# Altium PCB module.PcbDoc
Units mm, origin at the board's own origin, x right, y up, seen from the top; angles counter-clockwise.
Board outline 71 x 30.5 mm, 2 copper layers (Top Layer, Bottom Layer); 46 components, 44 nets, 183 pads, 36 vias.
Unrouted connection lines stored in the file: 2.
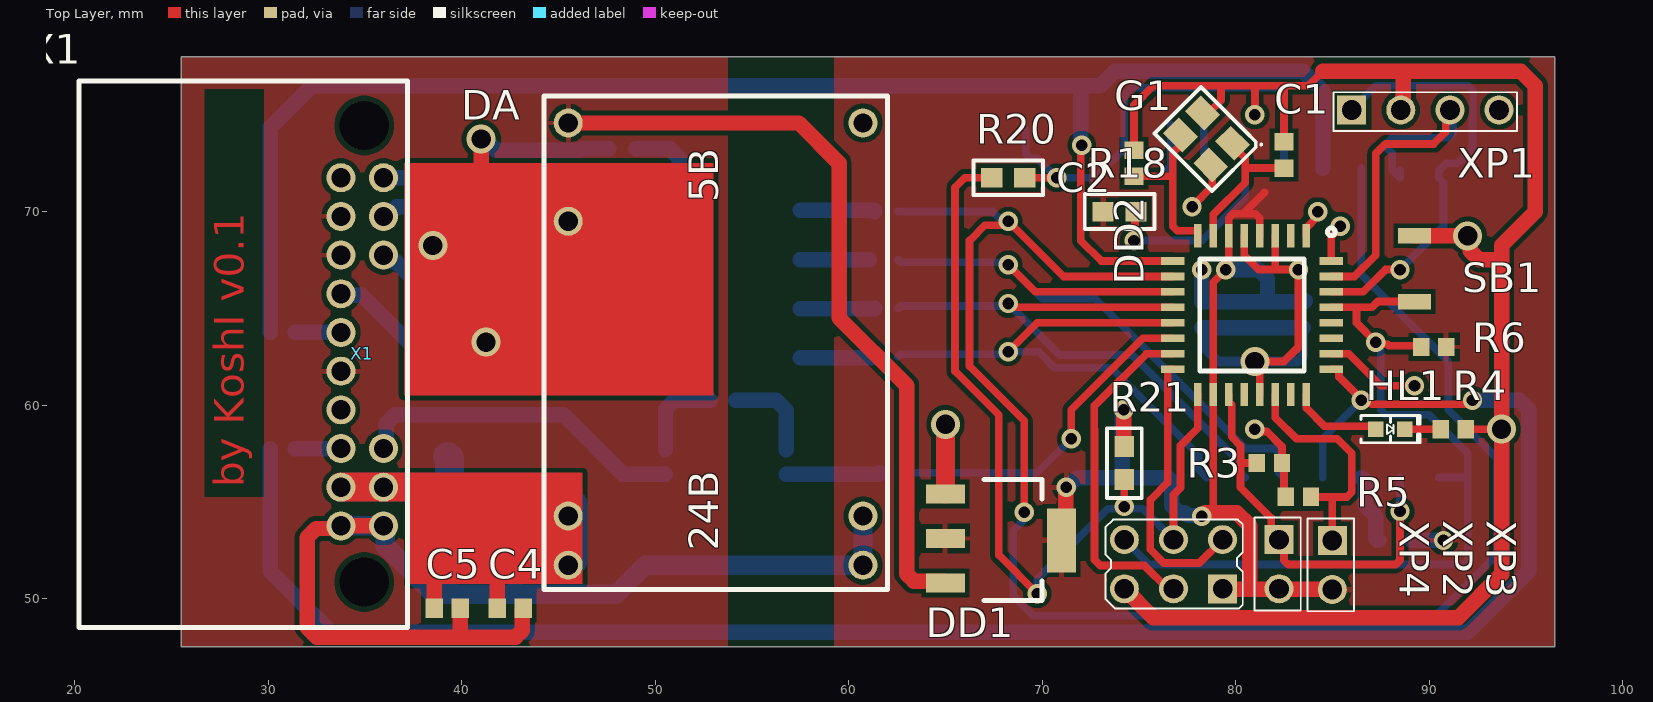
[diagram p0: Top Layer view]
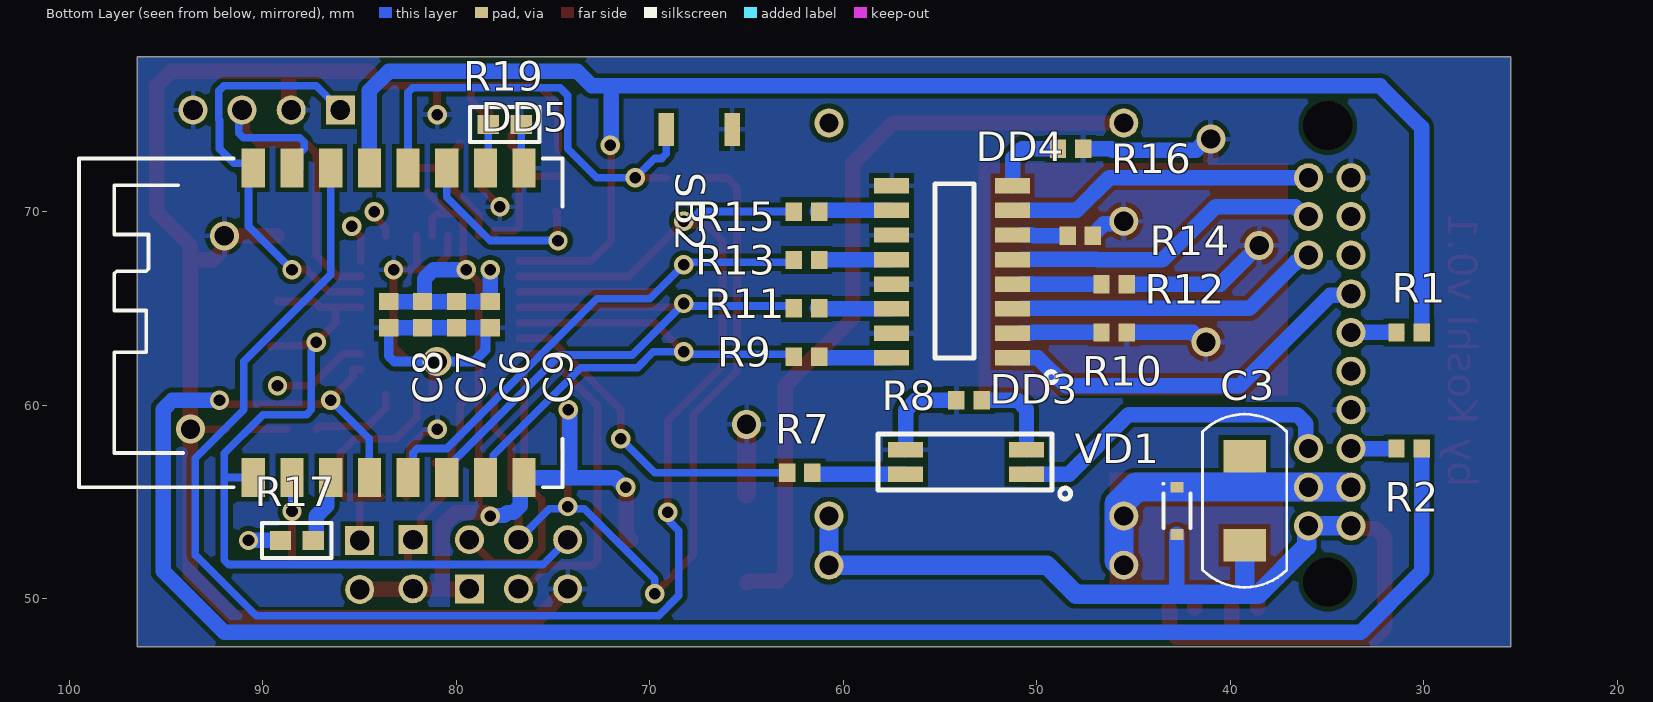
[diagram p1: Bottom Layer view, seen from below]
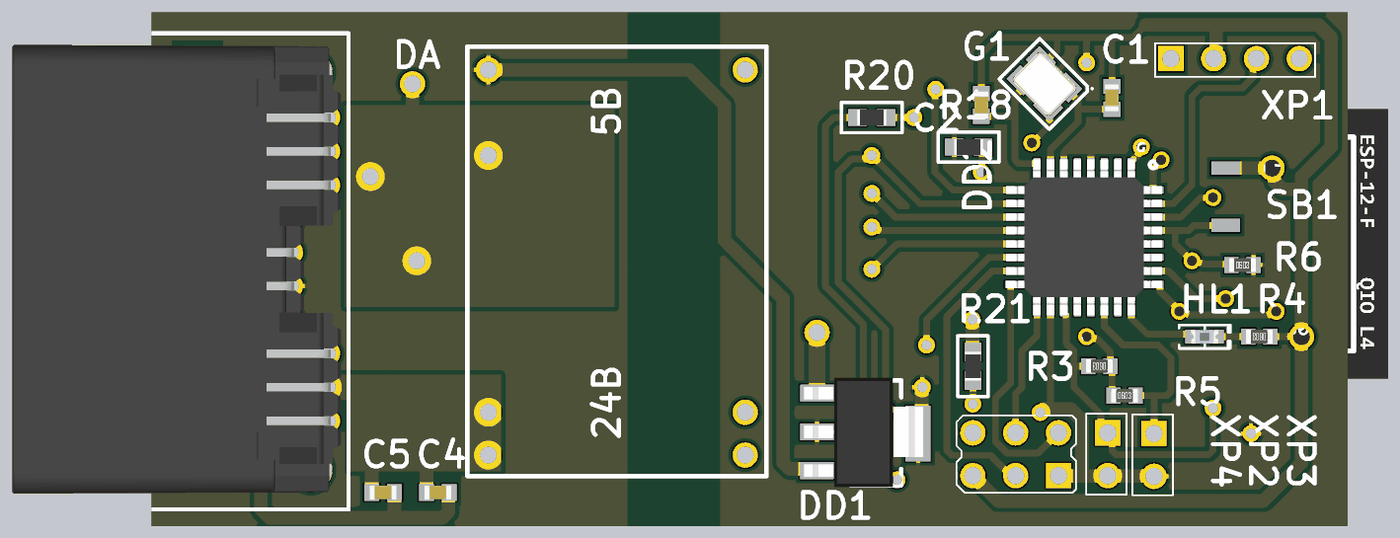
[diagram p2: 3D render of the assembled board from above, using the file's embedded part models]
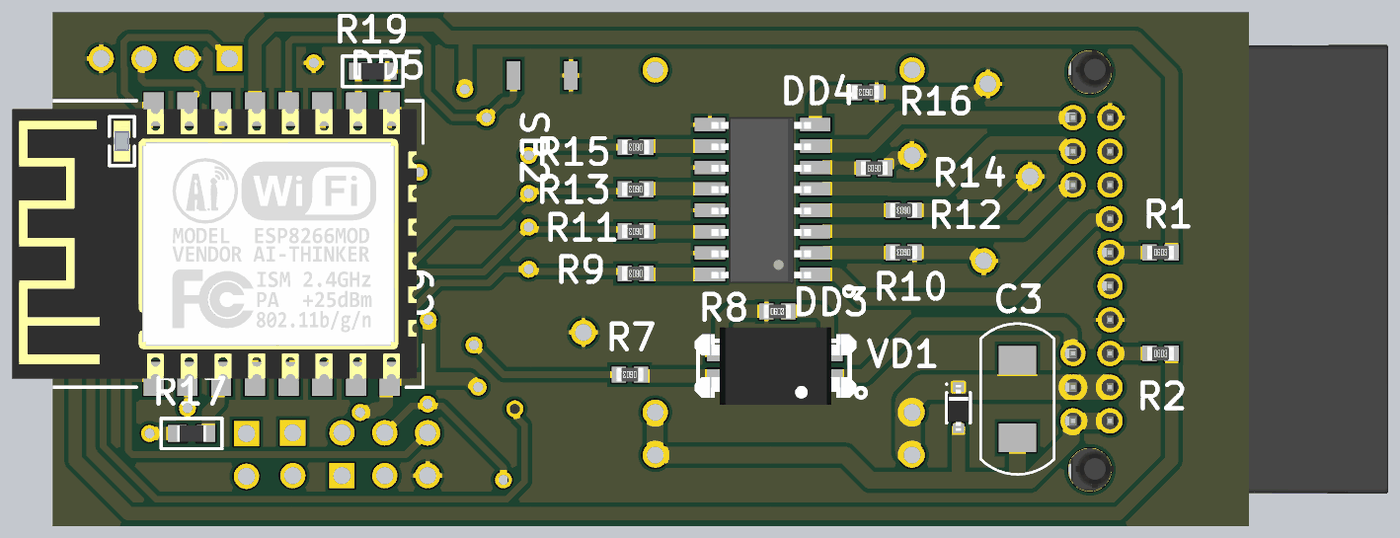
[diagram p3: 3D render of the assembled board from below, using the file's embedded part models]

## Layer stack, top to bottom
Top Solder: solder mask 0.0102, Solder Resist, Dk 3.5
Top Layer: signal copper 0.0356
Dielectric 1: dielectric 0.32, FR-4, Dk 4.8
Bottom Layer: signal copper 0.0356
Bottom Solder: solder mask 0.0102, Solder Resist, Dk 3.5

## Board outline
25.5,47.5 25.5,78 96.5,78 96.5,47.5

## Design rules (kind name [scope] priority, off if disabled: settings)
Clearance [All] p1: gap=0.254 ignorepadtopadclearanceinfootprint=FALSE
ComponentClearance ESP [InComponent('DD5')] p1: gap=0 collisioncheckmode=3 verticalgap=2540 showdistances=FALSE
ComponentClearance [All] p2: gap=0.01 collisioncheckmode=3 verticalgap=0.01 showdistances=FALSE
MinimumSolderMaskSliver [All] p1: minsoldermaskwidth=0.01
PolygonConnect [All] p1: connectstyle=Relief reliefconductorwidth=0.254 reliefentries=4 polygonreliefangle="90 Angle" airgapwidth=0.254
RoutingVias [All] p1: holewidth=0.6 width=1 viastyle="Through Hole" minholewidth=0.4 minwidth=0.5 maxholewidth=8 maxwidth=10
SolderMaskExpansion [All] p1: expansion=0.102 istentingtop=FALSE
Width [All] p1: maxlimit=10 minlimit=0.2 preferedwidth=0.254
28 further rules are at their usual default settings.

## Classes and differential pairs
component class "Лист 3. ESP8266": DD5 R17 R18 R19 R20 R21 SB2
net class UART: RX TX
net class SPI: MISO MOSI SCK/DTR
component class "Лист 1. Основной модуль. SchDoc": * C1 C2 C3 C4 C5 C6 C7 C8 C9 DA DD1 DD2 DD3 DD4 G1 HL1 R1 R2 R3 R4 R5 R6 R7 R8 R9 R10 R11 R12 R13 R14 R15 R16 SB1 VD1 X1 XP1 XP2 XP3 XP4

## Components (designator, comment, footprint, x,y, rotation, side; value= is the part's Value field where it differs from the comment)
C1 "CC0603KRX7R8BB104 (0603 X7R 0,1uF 50V 10%)_1" CAPC1608M 82.5,72.925 r270 top value=27
C2 "CC0603KRX7R8BB104 (0603 X7R 0,1uF 50V 10%)_1" CAPC1608M 74.75,72.5 r270 top value=27
C3 "CAP_SMD_POLAR" CC_T491C476K016AT 39.25,55.05 r270 bottom
C4 "CC0603KRX7R8BB104 (0603 X7R 0,1uF 50V 10%)_1" CAPC1608M 42.5,49.5 r0 top value="10 мк"
C5 "CC0603KRX7R8BB104 (0603 X7R 0,1uF 50V 10%)_1" CAPC1608M 39.25,49.5 r0 top value="0,1 мк"
C6 "CC0603KRX7R8BB104 (0603 X7R 0,1uF 50V 10%)_1" CAPC1608M 80,64.675 r270 bottom value="0,1 мк"
C7 "CC0603KRX7R8BB104 (0603 X7R 0,1uF 50V 10%)_1" CAPC1608M 81.75,64.675 r270 bottom value="0,1 мк"
C8 "CC0603KRX7R8BB104 (0603 X7R 0,1uF 50V 10%)_1" CAPC1608M 83.5,64.675 r270 bottom value="0,1 мк"
C9 "CC0603KRX7R8BB104 (0603 X7R 0,1uF 50V 10%)_1" CAPC1608M 78.25,64.675 r270 bottom value="10 мк"
DA "Tracopower" Tracopower 45.5,51.72 r90 top locked
DD1 "LM1117" SOT-223 65,55.4 r270 top
DD2 "ATmega328p" ATmega328P_TQFP 76.35,70.15 r270 top
DD3 "IS-281" IS-281 51.5,57 r90 bottom
DD4 "IS-281-4" SOIC16 51.25,62.44 r90 bottom
DD5 "ESP8266" ESP-12F 87.02,64.25 r90 bottom
G1 "25M/3225/20PPM/15PF" "EPSON TSX-3225" 78.5,73.75 r135 top
HL1 "LED" "LED 0603_1608 BLUE" 88,58.75 r0 top
R1 "RC0603FR-0710KL (0603 10k 1%)" RESC1608M 30.75,63.75 r180 bottom value=220
R2 "RC0603FR-0710KL (0603 10k 1%)" RESC1608M 30.75,57.75 r180 bottom value=220
R3 "RC0603FR-071KL (0603 1k 1%)" RESC1608M 81.75,57 r180 top value=1k
R4 "RC0603FR-071KL (0603 1k 1%)" RESC1608M 91.25,58.75 r180 top value=1k
R5 "RC0603FR-071KL (0603 1k 1%)" RESC1608M 83.25,55.25 r0 top value=1k
R6 "RC0603FR-0710KL (0603 10k 1%)" RESC1608M 90.25,63 r0 top value=10k
R7 "RC0603FR-0710KL (0603 10k 1%)" RESC1608M 62.25,56.5 r0 bottom value=220
R8 "RC0603FR-0710KL (0603 10k 1%)" RESC1608M 53.5,60.25 r180 bottom value=220
R9 "RC0603FR-0710KL (0603 10k 1%)" RESC1608M 61.9,62.5 r0 bottom value=220
R10 "RC0603FR-0710KL (0603 10k 1%)" RESC1608M 46,63.75 r0 bottom value=220
R11 "RC0603FR-0710KL (0603 10k 1%)" RESC1608M 61.9,65 r0 bottom value=220
R12 "RC0603FR-0710KL (0603 10k 1%)" RESC1608M 46,66.25 r0 bottom value=220
R13 "RC0603FR-0710KL (0603 10k 1%)" RESC1608M 61.9,67.5 r0 bottom value=220
R14 "RC0603FR-0710KL (0603 10k 1%)" RESC1608M 47.75,68.75 r0 bottom value=220
R15 "RC0603FR-0710KL (0603 10k 1%)" RESC1608M 61.9,70 r0 bottom value=220
R16 "RC0603FR-0710KL (0603 10k 1%)" RESC1608M 48.25,73.25 r0 bottom value=220
R17 "RC0603FR-0710KL (0603 10k 1%)" RESISTOR_0603_IPC782 88.25,53 r0 bottom value=10k
R18 "RC0603FR-0710KL (0603 10k 1%)" RESISTOR_0603_IPC782 74,70 r180 top value=10k
R19 "RC0603FR-0710KL (0603 10k 1%)" RESISTOR_0603_IPC782 77.5,74.5 r180 bottom value=10k
R20 "RC0603FR-0710KL (0603 10k 1%)" RESISTOR_0603_IPC782 68.25,71.75 r180 top value=220
R21 "RC0603FR-0710KL (0603 10k 1%)" RESISTOR_0603_IPC782 74.25,57 r270 top value=10k
SB1 "Butt" B3U1000P 89.25,65.35 r90 top
SB2 "Butt" B3U1000P 69.15,74.25 r180 bottom (schematic designator SB1)
VD1 "1N4148WS" SOD-323 42.75,54.53 r90 bottom
X1 "348269160" 348269160 35.95,71.75 r270 top locked
XP1 "4-pins_2.54mm" 4pins_2.54 83.46,70.17 r0 top
XP2 "2-pins_2.54mm" 2pins_2.54 77.17,55.58 r270 top
XP3 "2-pins_2.54mm" 2pins_2.54 79.92,55.54 r270 top
XP4 "6-pins_2.54mm" 6pins_2.54 81.87,55.58 r180 top

## Footprints (in the part's own frame and the unit in brackets; to place one, negate y for a bottom-side part, rotate by r counter-clockwise, add the part's x,y. Pads: shape width x height; smd on the part's side, far side on the other; paste and mask are expansions set on the pad)
2pins_2.54 [mm]
  rect 1.5x1.5 hole 1.02: 1(2.54,5.08)
  round 1.5 hole 1.02: 2(5.08,5.08)
  silkscreen extent 1.4,3.8 6.2,6.2
4pins_2.54 [mm]
  rect 1.5x1.5 hole 1.02: 1(2.54,5.08)
  round 1.5 hole 1.02: 2(5.08,5.08) 3(7.62,5.08) 4(10.16,5.08)
  silkscreen extent 1.6,4 11.1,6
6pins_2.54 [mm]
  rect 1.5x1.5 hole 1.02: 1(2.54,5.08)
  round 1.5 hole 1.02: 2(5.08,5.08) 3(7.62,5.08) 4(2.54,2.54) 5(5.08,2.54) 6(7.62,2.54)
  silkscreen extent 1.5,1.5 8.6,6.1
348269160 [mm] "Dual Row, 16 Circuit, Polarization Option A, 2.80mm Pin Length, Black, Tube"
  round 1.5 hole 1: 1(0,0) 2(2,0) 3(4,0) 4(14,0) 5(16,0) 6(18,0) 7(0,-2.2) 8(2,-2.2) 9(4,-2.2) 10(6,-2.2) 11(8,-2.2) 12(10,-2.2) 13(12,-2.2) 14(14,-2.2) 15(16,-2.2) 16(18,-2.2)
  round 2.5 hole 2.55: S(-2.7,-1) S(20.9,-1)
  silkscreen extent -5,-15.75 23.25,1.25, body extent -4.31,-18.7 22.31,0.8, height 12.58
ATmega328P_TQFP [mm]
  rect 1.2x0.4 smd: 1(1.4,7.3) 2(1.4,6.5) 3(1.4,5.7) 4(1.4,4.9) 5(1.4,4.1) 6(1.4,3.3) 7(1.4,2.5) 8(1.4,1.7) 17(9.6,1.7) 18(9.6,2.5) 19(9.6,3.3) 20(9.6,4.1) 21(9.6,4.9) 22(9.6,5.7) 23(9.6,6.5) 24(9.6,7.3)
  rect 0.4x1.2 smd: 9(2.7,0.4) 10(3.5,0.4) 11(4.3,0.4) 12(5.1,0.4) 13(5.9,0.4) 14(6.7,0.4) 15(7.5,0.4) 16(8.3,0.4) 25(8.3,8.6) 26(7.5,8.6) 27(6.7,8.6) 28(5.9,8.6) 29(5.1,8.6) 30(4.3,8.6) 31(3.5,8.6) 32(2.7,8.6)
  silkscreen extent 1,1.8 8.4,8.8, body extent 0.87,-0.12 10.12,9.13, height 0.9
B3U1000P [mm] "Кнопка тактильная 3.2х2.5х1.2мм вертикальная, тип контактов SPST-NO, SMD монтаж"
  rect 0.8x1.7 smd: 1(0,0) 2(3.4,0)
CAPC1608M [mm] "Chip Capacitor, Body 1.6x0.8mm, IPC Low Density (0603)"
  rect 0.9x1 smd: 1(-0.675,0) 2(0.675,0)
  body extent -0.8,-0.41 0.8,0.41, height 0.82
CC_T491C476K016AT [mm]
  rect 1.7x2.2 smd: 1(-2.3,0) 2(2.3,0)
  silkscreen extent -4.48,-2.18 4.48,2.18
"EPSON TSX-3225" [mm] "Crystal, 4-Leads, Body 2.50x3.20mm, Pitch 2.20mm, IPC Medium Density"
  rect 1.4x1.15 smd: 1(-1.1,-0.8) 2(1.1,-0.8) 3(1.1,0.8) 4(-1.1,0.8)
  silkscreen extent -2.25,-1.85 2.1,1.7, body extent -1.61,-1.26 1.61,1.26, height 0.6
ESP-12F [mm]
  rect 2x1.2 smd: 1(-8,3.48) 2(-8,1.48) 3(-8,-0.52) 4(-8,-2.52) 5(-8,-4.52) 6(-8,-6.52) 7(-8,-8.52) 8(-8,-10.52) 9(8,-10.52) 10(8,-8.52) 11(8,-6.52) 12(8,-4.52) 13(8,-2.52) 14(8,-0.52) 15(8,1.48) 16(8,3.48)
  silkscreen extent -8.5,-12.5 8.5,12.5, body extent -8,-12.13 8,11.87, height 3.17
IS-281 [mm]
  rect 0.8x1.8 smd: 1(-0.58,-0.971) 2(0.69,-0.971) 3(0.69,5.279) 4(-0.58,5.279)
  silkscreen extent -1.86,-3.25 1.5,6.7, body extent -2.3,-2.7 2.3,6.9, height 3.8
"LED 0603_1608 BLUE" [mm] "Chip Diode, 2-Leads, Body 1.60x0.80mm, IPC Medium Density"
  rect 0.8x0.8 smd: 1(-0.75,0) 2(0.75,0)
  silkscreen extent -1.52,-0.7 1.52,0.7, body extent -0.8,-0.4 0.8,0.4, height 0.53
RESC1608M [mm] "Chip Resistor, Body 1.6x0.8mm, IPC Low Density (0603)"
  rect 0.85x0.95 smd: 1(-0.65,0) 2(0.65,0)
  body extent -0.8,-0.4 0.8,0.4, height 0.45
RESISTOR_0603_IPC782 [mm]
  rect 1.1x1 smd paste+0 mask+0.1: 1(-0.85,0) 2(0.85,0)
  silkscreen extent -1.8,-0.9 1.8,0.9, body extent -0.85,-0.48 0.85,0.48, height 0.6
SOD-323 [mm] "SOD-323, 2-Leads, Body 1.70x1.25mm"
  rect 0.56x0.69 smd: 1(-1.22,0) 2(1.22,0)
  silkscreen extent -0.9,-0.7 1.45,0.75, body extent -1.36,-0.63 1.36,0.63, height 1.2
SOIC16 [mm]
  rect 0.8x1.8 smd: 1(0,0) 2(1.27,0) 3(2.54,0) 4(3.81,0) 5(5.08,0) 6(6.35,0) 7(7.62,0) 8(8.89,0) 9(8.89,6.25) 10(7.62,6.25) 11(6.35,6.25) 12(5.08,6.25) 13(3.81,6.25) 14(2.54,6.25) 15(1.27,6.25) 16(0,6.25)
  silkscreen extent -1.28,-2.28 9,4, body extent -0.55,0.25 9.35,6.15, height 1.5
SOT-223 [mm] "LM-1117"
  rect 1x2 smd: 1(4.6,0) 2(0,0) 3(2.3,0)
  rect 3.3x1.5 smd: 3(2.4,6)
  silkscreen extent -0.75,2 5.5,5, body extent -0.91,-0.77 5.59,6.3, height 1.6
Tracopower [mm] "24V->5V 1000mA"
  round 1.5 hole 1: 1(0,0) 1(2.54,0) 2(0,-15.24) 2(2.54,-15.24) 3(17.78,0) 4(22.86,0) 5(22.86,-15.24)
  silkscreen extent -1.25,-16.5 24.25,1.25, body extent -1.38,-16.63 24.38,1.38, height 10

## Part data
C1 C2 C4 C5 C6 C7 C8 C9: "0603 X7R 0,1uF 25V 10%", Capacitance,uF="0.1 ±10%", Operating temperature range,°С=-55...+125, Rated voltage, Vdc=50, Temperature characteristics=X7R, ValueManufacturerPartNumber="chip0603 X7R 0,1uF 50V 10%, CC0603KRX7R9BB104, Yageo", Component height, mm=0.8, Gomponent weight, g=0,007, Size code in inch(mm)="0603 (1608M)"
DA: library part TracoPower
DD2: "32 pins. SPI, UART, 4 CHANNELS ADC, 13 GPIO PORTS"
DD5: "MCU", Manufacturer="ST Microelectronics", Package=-, PackageType=TSSOP, Part Number=STM32F030F4P6, TemperatureOperating_max=85, TemperatureOperating_min=-40, ValueManufacturerPartNumber="STM32F030F4P6, TSSOP-20 ST Microelectronics", ExtendedParameters="ARM® 32-bit Cortex™-M3 CPU,  / frequency up to 48 Mhz16 to 64 Kbytes of Flash / 64 Kbytes of SRAM / 12-channel DMA controller / USB OTG, Ethernet, 10 timers, / 2 CANs, 2 ADCs,  / 14 communication interfaces", FullName="Микросхема STM32F030F4P6 ST Microelectronics", Functionality=Микропроцессоры, ID=ESP8266, Mounting=SMT, Type=Микросхема
G1: "7B025000O01 Резонатор", ValueManufacturerPartNumber=7B25000O01
HL1: "Chip LED", ValueManufacturerPartNumber=Светодиод
R1 R2 R6 R7 R8 R9 R10 R11 R12 R13 R14 R15 R16 R17 R18 R19 R20 R21: "chip0603 10k 1%", ValueManufacturerPartNumber="chip0603 10k 1%, RC0603FR-0710KL, Yageo", Допуск,%=1, Максимально допустимое напряжение, В=100, Мощность, Вт=0,1, Номинальное напряжение, В=50, Номинальное сопротивление, кОм=10, Производитель=Yageo, Рабочий диапазон температур,°С=-55...+155, Тип корпуса=0603
R3 R4 R5: "chip0603 1k 1%", ValueManufacturerPartNumber="chip0603 1k 1%, RC0603FR-071KL, Yageo", Допуск,%=1, Максимально допустимое напряжение, В=100, Мощность, Вт=0,1, Номинальное напряжение, В=50, Номинальное сопротивление, кОм=1, Производитель=Yageo, Рабочий диапазон температур,°С=-55...+155, Тип корпуса=0603
VD1: "Chip DIOD 100В 150мА", ValueManufacturerPartNumber=1N4148WS
XP1 XP2 XP3 XP4: ValueManufacturerPartNumber="4 pins"
C3: Отклонение от номинала=%

## Via types
v1: diameter 1, hole 0.6, Top Layer to Bottom Layer, 29 vias
v2: diameter 1.5, hole 1, Top Layer to Bottom Layer, 7 vias

## Nets (pads, with @x,y where several pads share a name; then routed paths per layer and width w, separated by ;. In a path a pad name is that pad's centre, name@x,y a point inside that pad or via, vN(x,y) a via of type N, cw(c..) or ccw(c..) an arc to the next point about the centre after c; other vN are vias at no path point)
24GND: C3.2 C4.2 C5.2 DA.2 VD1.1 X1.6 X1.16 | length 60.8
  Top Layer w0.8: X1.6 X1.16 33.616,53.616 32.469,53.616 32,53.147 32,48.5 32.5,48 40,48 ; C5.2 39.925,48.075 40,48 ; C4.2 43.125,49.45 43.125,48.344 42.781,48 40,48
  Bottom Layer w0.8: 42.75,50.216 VD1.1
  Bottom Layer w1: X1.16 X1.6 36.046,53.654 36.046,52.704 38.534,50.216 39.25,50.216 ; C3.2 39.25,50.216 ; DA.2@60.74,54.26 60.74,51.72 49.47,51.72 47.966,50.216 42.75,50.216 39.25,50.216
+5В: DA.4 DD1.1 X1.8 X1.9 X1.12 | length 39.7
  Top Layer w0.8: DA.4 57.42,74.58 59.5,72.5 59.5,64.5 63,61 63,51.269 63.369,50.9 64.9,50.9 DD1.1
+5В_avr/+3_3_ESP: C6.1 C7.1 C8.1 C9.1 DD1.3 DD2.4 DD2.6 DD2.18 DD5.8 R6.2 R17.2 R18.2 R21.1 XP2.2 XP3.2 XP4.1 | length 60.7
  Top Layer w0.4: 79,54.444 78.85,54.594 DD2.18 78.85,66.35 v1(79.5,67) 79.65,67.15 DD2.6 79.65,69.65 79.884,69.884 80.45,69.884 ; DD2.4 81.25,69.65 81.016,69.884 80.45,69.884 ; 81.5,71 80.45,69.95 80.45,69.884
  Top Layer w0.8: DD1.3@71,53 71.212,53.212 71.212,55.712 v1(71.25,55.75) ; v1(74.211,59.757) 74.231,59.738 74.231,57.869 R21.1 ; v1(78.25,54.25) 78.444,54.444 79,54.444 80.056,54.444 80.734,53.766 80.734,50.496 80.75,50.48 ; XP4.1 79.35,50.48 80.75,50.48 ; XP3.2 84.98,50.48 80.75,50.48
  Bottom Layer w0.8: v1(71.25,55.75) 71.304,55.75 71.804,56.25 74.152,56.25 ; v1@74.25,59.75 74.152,59.652 74.152,56.25 ; v1(78.25,54.25) 78.212,54.288 77.527,54.288 77.372,54.444 77.056,54.444 76.75,54.75 76.7,54.8 76.7,56.05 DD5.8 74.152,56.25 ; v1(78.25,67) C9.1 C6.1 C7.1@81.7,65.35 ; v1(79.5,67) 81.181,67 81.65,66.531 81.65,65.4 C7.1@81.7,65.35 ; C7.1 C7.1@81.7,65.35 ; C7.1@81.8,65.35 C8.1 83.55,65.35 C8.1@83.6,65.4 ; R17.2 v1@90.5,53
  other v1: 90.75,53
+24В: C3.1 C4.1 C5.1 DA.1 VD1.2 X1.5 X1.15 | length 25.7
  Top Layer w0.8: 38.5,51.5 38.575,51.425 C5.1 ; 41.75,51.75 41.825,51.675 C4.1
  Top Layer w1.5: X1.15 X1.5 37.75,55.75
  Bottom Layer w1.5: X1.15 X1.5 39.35,55.75 ; C3.1 39.35,57.25 39.35,55.75 ; DA.1@45.5,51.72 45.75,51.97 45.75,54.01 DA.1@45.5,54.26 ; DA.1@45.75,54.26 45.75,54.871 44.871,55.75 VD1.2 39.35,55.75
ADC_1: DD2.19 DD5.2 R3.2 XP2.1 | length 21.1
  Top Layer w0.4: DD2.19 79.65,60.15 79.796,60.004 79.796,58.355 80.25,57.901 80.25,57 ; R3.2 80.25,57 ; v1(88.5,54.5) 88.5,51.984 88.266,51.75 82.734,51.75 82.5,51.984 82.5,52.79 81.844,53.446 81.844,54.156 80.25,55.75 80.25,57
  Bottom Layer w0.4: v1(88.5,54.5) DD5.2
ADC_2: DD2.22 R5.2 XP3.1 | length 12.4
  Top Layer w0.4: DD2.22 82.05,59.35 83.15,58.25 85.25,58.25 86,57.5 86,55.484 85.766,55.25 85,55.25 ; R5.2 85,55.25 ; XP3.1 85,55.25
EN: DD5.3 R17.1 | length 3.7
  Bottom Layer w0.8: DD5.3 86.7,56.05 86.7,54.8 87.25,54.25 87.25,53.1 87.35,53 R17.1
GND: C1.1 C2.1 C6.2 C7.2 C8.2 C9.2 DA.3 DD1.2 DD2.3 DD2.5 DD2.21 DD3.3 DD4.9 DD4.11 DD4.13 DD4.15 DD5.9 G1.2 G1.4 R3.1 R4.1 R5.1 R8.1 R10.1 R12.1 R14.1 R16.1 R19.2 SB1.2 SB2.2 X1.7 X1.13 XP1.2 XP1.4 XP4.3 | length 170.1
  Top Layer w0.4: C2.1 74.75,75.5 75.75,76.5 79.25,76.5 ; v1(77.75,70.25) 78.801,71.301 78.801,72.318 G1.4 ; G1.2 78.594,75.094 79.25,75.75 79.25,76.5 ; DD2.5 80.45,67.742 81.192,67 v1(83.25,67) 83.25,63 82.5,62.25 v2(81,62.25) 81,61.952 81.25,61.702 DD2.21 ; v1(81,58.75) 81.115,58.635 81.615,58.635 82.4,57.85 R3.1 82.5,56.9 82.5,55.42 82.465,55.385 R5.1 ; v1(81,75) 81,76.5 ; 82.05,67.171 DD2.3 ; C1.1 82.5,76.5 ; 84.5,77.25 83.75,76.5 82.5,76.5 ; R4.1 v2(93.75,58.75) ; 79.25,76.5 81,76.5 ; 81,76.5 82.5,76.5
  Top Layer w0.8: v2(38.5,68.25) 40.4,68.25 40.873,68.723 40.873,69.75 ; v2(41,73.75) 41,69.877 40.873,69.75 ; v2(41.25,63.25) 41.25,65 43.375,67.125 ; DA.3 41.123,69.5 40.873,69.75 ; XP4.3 75.75,49 91.5,49 93.75,51.25 v2(93.75,58.75) 93.75,67.5 ; 84.5,77.25 88.75,77.25 ; XP1.2 88.674,75.384 88.674,77.174 88.75,77.25 ; SB1.2 v2(92,68.75) 92.134,68.616 92.134,67.969 92.603,67.5 93.75,67.5 ; 88.75,77.25 94.75,77.25 95.5,76.5 95.5,70 93.75,68.25 93.75,67.5
  Top Layer w1: DD1.2 v2(65,59)
  Bottom Layer w0.4: DD5.9 76.65,72.4 R19.2
  Bottom Layer w0.5: C9.2 78.3,64 78.5,63.8 78.5,62.845 79.095,62.25 v2(81,62.25) 83.207,62.25 83.5,62.543 C8.2
  Bottom Layer w0.8: v2(38.5,68.25) 40.5,66.25 R12.1 ; v2(41,73.75) 41.189,73.75 41.763,73.176 46.082,73.176 46.156,73.25 R16.1 ; v2(41.25,63.25) 41.439,63.25 41.939,63.75 R10.1 ; DA.3 45.634,69.366 46.534,69.366 47.1,68.8 R14.1 ; R8.1 56.25,60.25 56.5,60 56.779,59.721 DD3.3 ; C9.2 C6.2 C7.2 C8.2
IO0: DD5.12 R20.1 SB2.1 | length 24.3
  Top Layer w0.4: R20.1 v1(70.75,71.75)
  Bottom Layer w0.4: SB2.1 69.15,72.984 69.384,72.75 69.75,72.75 v1(70.75,71.75) 72.75,71.75 74.25,73.25 74.25,76 74.646,76.396 82.266,76.396 82.5,76.162 DD5.12
IO2: DD2.24 DD5.11 HL1.1 R18.1 | length 14.5
  Top Layer w0.4: v1(74.75,68.5) 74.8,68.55 74.8,69.95 R18.1 ; DD2.24 83.65,59.85 84.596,58.904 87.096,58.904 HL1.1
  Bottom Layer w0.4: v1(74.75,68.5) 78.25,68.5 80.5,70.75 DD5.11
IO15: DD5.10 R19.1 | length 2.3
  Bottom Layer w0.4: R19.1 78.35,72.4 DD5.10
LENT_1: DD2.25 DD5.4 R2.2 | length 98.7
  Top Layer w0.4: DD2.25 85.35,61.85 85.35,61.45 86.615,60.185 86.615,60.135 86.945,60.135 87.034,60.046 91.884,60.046 92.088,60.25 v1(92.25,60.25)
  Bottom Layer w0.4: DD5.4 84.5,58.25 v1(86.5,60.25)
  Bottom Layer w0.8: R2.2 30.1,51.4 33.25,48.25 92,48.25 95.154,51.404 95.154,59.781 94.685,60.25 v1(92.25,60.25)
LENT_2: DD2.9 DD5.13 R1.2 | length 83.8
  Top Layer w0.4: v1@72,73.5 72,68.5 73.05,67.45 DD2.9
  Bottom Layer w0.8: R1.2 30.1,74.35 32.25,76.5 72,76.5 ; v1@72,73.5 72,76.5 ; DD5.13 84.5,76.25 83.5,77.25 73.75,77.25 73,76.5 72,76.5
  other v1: 72.043,73.429
MISO: DD2.16 XP4.4 | length 14.8
  Top Layer w0.4: DD2.16 76.5,61.85 76.5,56 75.586,55.086 75.586,52.541 76.291,51.836 78.126,51.836 XP4.4 XP4.4@79.12,53.25
MOSI: DD2.15 XP4.2 | length 17.8
  Top Layer w0.4: DD2.15 75.4,62.65 72.698,59.948 72.698,58.755 72.704,58.749 72.704,52 73,51.704 75.288,51.704 76.492,50.5 XP4.2
NetC1_2: C1.2 DD2.7 G1.1 | length 7.7
  Top Layer w0.4: DD2.7 78.85,69.85 80.5,71.5 80.5,72.25 ; G1.1 79.844,73.406 80.5,72.75 80.5,72.25 ; C1.2 80.5,72.25
NetC2_2: C2.2 DD2.8 G1.3 | length 8.5
  Top Layer w0.4: C2.2 76.75,71.825 ; G1.3 77.156,73.445 76.75,73.038 76.75,71.825 ; DD2.8 78.05,69.016 76.984,69.016 76.75,69.25 76.75,71.825
NetDD3_2: DD3.2 R8.2 | length 4.6
  Bottom Layer w0.8: DD3.2 50.529,59.779 51,60.25 R8.2
NetDD3_4: DD3.4 R7.1 | length 4.9
  Bottom Layer w0.8: DD3.4 61.57,56.42 61.6,56.45 R7.1
NetDD4_2: DD4.2 R10.2 | length 4.1
  Bottom Layer w0.8: R10.2 50.23,63.75 50.25,63.73 DD4.2@50.75,63.73
NetDD4_4: DD4.4 R12.2 | length 4.1
  Bottom Layer w0.8: R12.2 50.23,66.25 50.25,66.27 DD4.4@50.75,66.27
NetDD4_6: DD4.6 R14.2 | length 2.4
  Bottom Layer w0.8: R14.2 50.19,68.75 50.25,68.81 DD4.6@50.75,68.81
NetDD4_8: DD4.8 R16.2 | length 3.9
  Bottom Layer w0.8: R16.2@49,73.25 50.75,73.25 51.25,72.75 DD4.8
NetDD4_10: DD4.10 R15.1 | length 3.9
  Bottom Layer w0.8: DD4.10 61.325,70.06 61.35,70.035 R15.1@61.35,70
NetDD4_12: DD4.12 R13.1 | length 3.6
  Bottom Layer w0.8: DD4.12 R13.1@61.07,67.52
NetDD4_14: DD4.14 R11.1 | length 3.9
  Bottom Layer w0.8: DD4.14 61.33,64.98 R11.1@61.35,65
NetDD4_16: DD4.16 R9.1 | length 3.8
  Bottom Layer w0.8: DD4.16 61.225,62.44 61.25,62.465 R9.1
NetHL1_2: HL1.2 R4.2 | length 1.9
  Top Layer w0.4: HL1.2 R4.2
NetR1_1: R1.1 X1.11 | length 2.4
  Bottom Layer w0.8: R1.1 X1.11
NetR2_1: R2.1 X1.14 | length 2.4
  Bottom Layer w0.8: R2.1 X1.14
RESET: DD2.29 DD5.1 R6.1 SB1.1 XP4.6 | length 43.5
  Top Layer w0.4: DD2.29 86.25,65.05 ; SB1.1 87.35,65.35 87.05,65.05 86.25,65.05 ; R6.1 89.537,63.063 87.938,63.063 87.865,63.135 87.365,63.135 v1(87.25,63.25) 86.25,64.25 86.25,65.05
  Bottom Layer w0.4: XP4.6 75.54,51.75 91.766,51.75 92,51.984 92,56.25 ; v1(87.25,63.25) 87.25,63.088 87.5,62.838 87.5,59.75 87.75,59.5 90,59.5 92,57.5 92,56.25 ; DD5.1 92,56.25
RX: DD2.30 DD5.16 XP1.1 | length 22.3
  Top Layer w0.4: DD2.30 86.6,65.85 87.75,67 v1(88.5,67)
  Bottom Layer w0.4: XP1.1 87.25,76.5 92.016,76.5 92.284,76.232 92.284,74.751 92.25,74.717 92.25,73.25 91.5,72.5 90.9,72.5 90.5,72.1 90.5,71.75 90.75,71.5 90.75,69.25 v1(88.5,67)
SCK/DTR: DD2.17 R20.2 R21.2 XP4.5 | length 44.4
  Top Layer w0.4: R20.2 66,71.75 65.5,71.25 65.5,61.75 67.75,59.5 67.75,52.25 v1(69.75,50.25) ; v1(74.25,54.75) R21.2 ; XP4.5 76.79,55.365 77.154,55.729 77.154,57.904 78.05,58.8 DD2.17
  Bottom Layer w0.4: v1(69.75,50.25) 69.753,50.253 69.753,51.003 73.385,54.635 74.135,54.635 v1(74.25,54.75) 74.365,54.635 75.195,54.635 XP4.5
Sens_1: DD4.1 X1.10 | length 20.1
  Bottom Layer w0.8: X1.10 33.829,65.671 34.829,65.671 39.5,61 48.5,61 49.94,62.44 DD4.1
Sens_1_avr: DD2.13 DD5.7 R9.2 | length 28.3
  Top Layer w0.4: v1(68.25,62.75) 69.75,64.25 DD2.13
  Bottom Layer w0.4: R9.2 62.675,62.625 68.125,62.625 v1(68.25,62.75) 69.825,62.75 70.642,61.933 73.567,61.933 78.1,57.4 78.1,56.65 DD5.7
Sens_2: DD4.3 X1.3 | length 15.9
  Bottom Layer w0.8: X1.3 36.139,67.75 36.489,67.4 36.6,67.4 39,65 DD4.3@50.75,65
Sens_2_avr: DD2.12 DD5.6 R11.2 | length 30.7
  Top Layer w0.4: v1(68.25,65.25) 68.45,65.05 DD2.12
  Bottom Layer w0.4: R11.2 62.675,65.125 68.125,65.125 v1(68.25,65.25) 70.913,62.587 74.663,62.587 80.1,57.15 80.1,56.65 DD5.6
Sens_3: DD4.5 X1.2 | length 16.2
  Bottom Layer w0.8: X1.2 36.139,69.75 36.639,70.25 40.75,70.25 43.5,67.5 46.855,67.5 46.895,67.54 DD4.5@50.75,67.54
Sens_3_avr: DD2.11 DD5.5 R13.2 | length 34.3
  Top Layer w0.4: v1(68.25,67.25) 69.65,65.85 DD2.11
  Bottom Layer w0.4: R13.2 62.675,67.375 68.125,67.375 v1(68.25,67.25) 70,65.5 72.75,65.5 80.5,57.75 82.016,57.75 82.25,57.516 82.25,56.5 DD5.5
Sens_4: DD4.7 X1.1 | length 15.5
  Bottom Layer w0.8: X1.1 46.25,71.75 47.92,70.08 DD4.7@50.75,70.08
Sens_4_avr: DD2.10 DD5.14 R15.2 | length 87.4
  Top Layer w0.4: v1(69.072,54.462) 69.072,59.178 66.25,62 66.25,68.5 67.04,69.29 68.04,69.29 v1(68.25,69.5) 71.1,66.65 DD2.10
  Bottom Layer w0.4: R15.2 67.452,70 67.952,69.5 v1(68.25,69.5) ; v1@69,54.5 68.957,54.457 68.957,53.957 68.5,53.5 68.5,50.151 69.547,49.104 90.354,49.104 93.5,52.25 93.5,57.25 91,59.75 91,62.25 86.5,66.75 DD5.14
Sens_5: DD3.1 X1.4 | length 17.3
  Bottom Layer w0.8: X1.4 36.084,57.884 36.084,59.031 36.553,59.5 45.25,59.5 48.33,56.42 DD3.1
Sens_5_avr: DD2.14 R7.2 | length 17.6
  Top Layer w0.4: v1(71.5,58.25) 71.5,59.75 75.2,63.45 DD2.14
  Bottom Layer w0.4: R7.2 69.75,56.5 v1(71.5,58.25)
TX: DD2.31 DD5.15 XP1.3 | length 20.6
  Top Layer w0.4: DD2.31 86.15,66.65 87.25,67.75 87.25,73 87.75,73.5 90.25,73.5 90.87,74.12 90.87,75.04 XP1.3
  Bottom Layer w0.4: DD5.15@88.5,72.15 88.5,71.75 88.1,72.15 88.1,73.016 87.866,73.25 87.866,73.581 88.1,73.816 91.016,73.816 91.25,74.05 91.25,75.08 XP1.3
pads on no net: DA.5 DD2.1 DD2.2 DD2.20 DD2.23 DD2.26 DD2.27 DD2.28 DD2.32 X1.S
copper on no net: | length 8.5
  Top Layer w0.4: 83.65,68.75 83.65,69.15 84.25,69.75 v1(84.25,70) ; 84.95,62.65 85.85,62.65 87.5,61 v1(89.25,61) ; 84.95,67.45 84.95,68.7 85.422,69.172 v1@85.422,69.3
  other v1: 85.419,69.239

## Polygon pours and split planes (outlines as drawn)
+5В_avr/+3_3_ESP on Top Layer "NONET_L01_P-001" (solid, pour order 2): 59.25,78 96.5,78 96.5,47.5 59.25,47.5
+5В on Top Layer "NONET_L01_P-001" (solid, pour order 0): 25.5,78 53.75,78 53.75,47.5 25.5,47.5
GND on Bottom Layer "NONET_L01_P-001" (solid, pour order 1): 25.5,78 96.5,78 96.5,47.5 25.5,47.5

## Other copper
Top Layer:
  rectangle net GND: 37,60.5 53,72.5
  rectangle net +24В: 37.25,50.75 46.25,56.5
  pour cut-out: 84.096,61.404 85.654,61.404 85.75,61.5 86.25,61 86.25,59.25 84.25,59.25 84.123,59.377
  pour cut-out: 83,58 83.21,58.21 85.944,58.21 85.944,55.429 85.766,55.25 83,55.25
  pour cut-out: 79.25,57.905 79.591,57.905 79.923,57.574 79.923,55.367 82.25,53.04 82.25,50 81.75,49.5 78.25,49.5 78.25,53 77.25,54
  pour cut-out: 74.5,62.25 79.25,62.25 79.25,55.75 76.75,53.25 73,53.25 73,60.5 73.75,61.25
  pour cut-out: 77.596,67.904 77.604,67.896 84.096,67.896 84.096,61.404 77.604,61.404
  text "by KoshI v0.1" at 28.738,55.754 h1.52 r90

## Silkscreen, mask and mechanical layers (free items; w line width, h text height)
Mechanical 1:
  the board outline again, w0.254

## Text inside footprints (layer, text, board x,y; h text height)
DA: Top Overlay "24B" at 53.246,52.474 h1.52 r90; Top Overlay "5B" at 53.246,70.474 h1.52 r90